# Altium PCB LPCB228R0.PcbDoc
Units mm, origin at the board's own origin, x right, y up, seen from the top; angles counter-clockwise.
Board outline 176 x 129 mm, 4 copper layers (Top Layer, MidLayer1, Mid-Layer 2, Bottom Layer); 69 components, 40 nets, 441 pads, 87 vias.
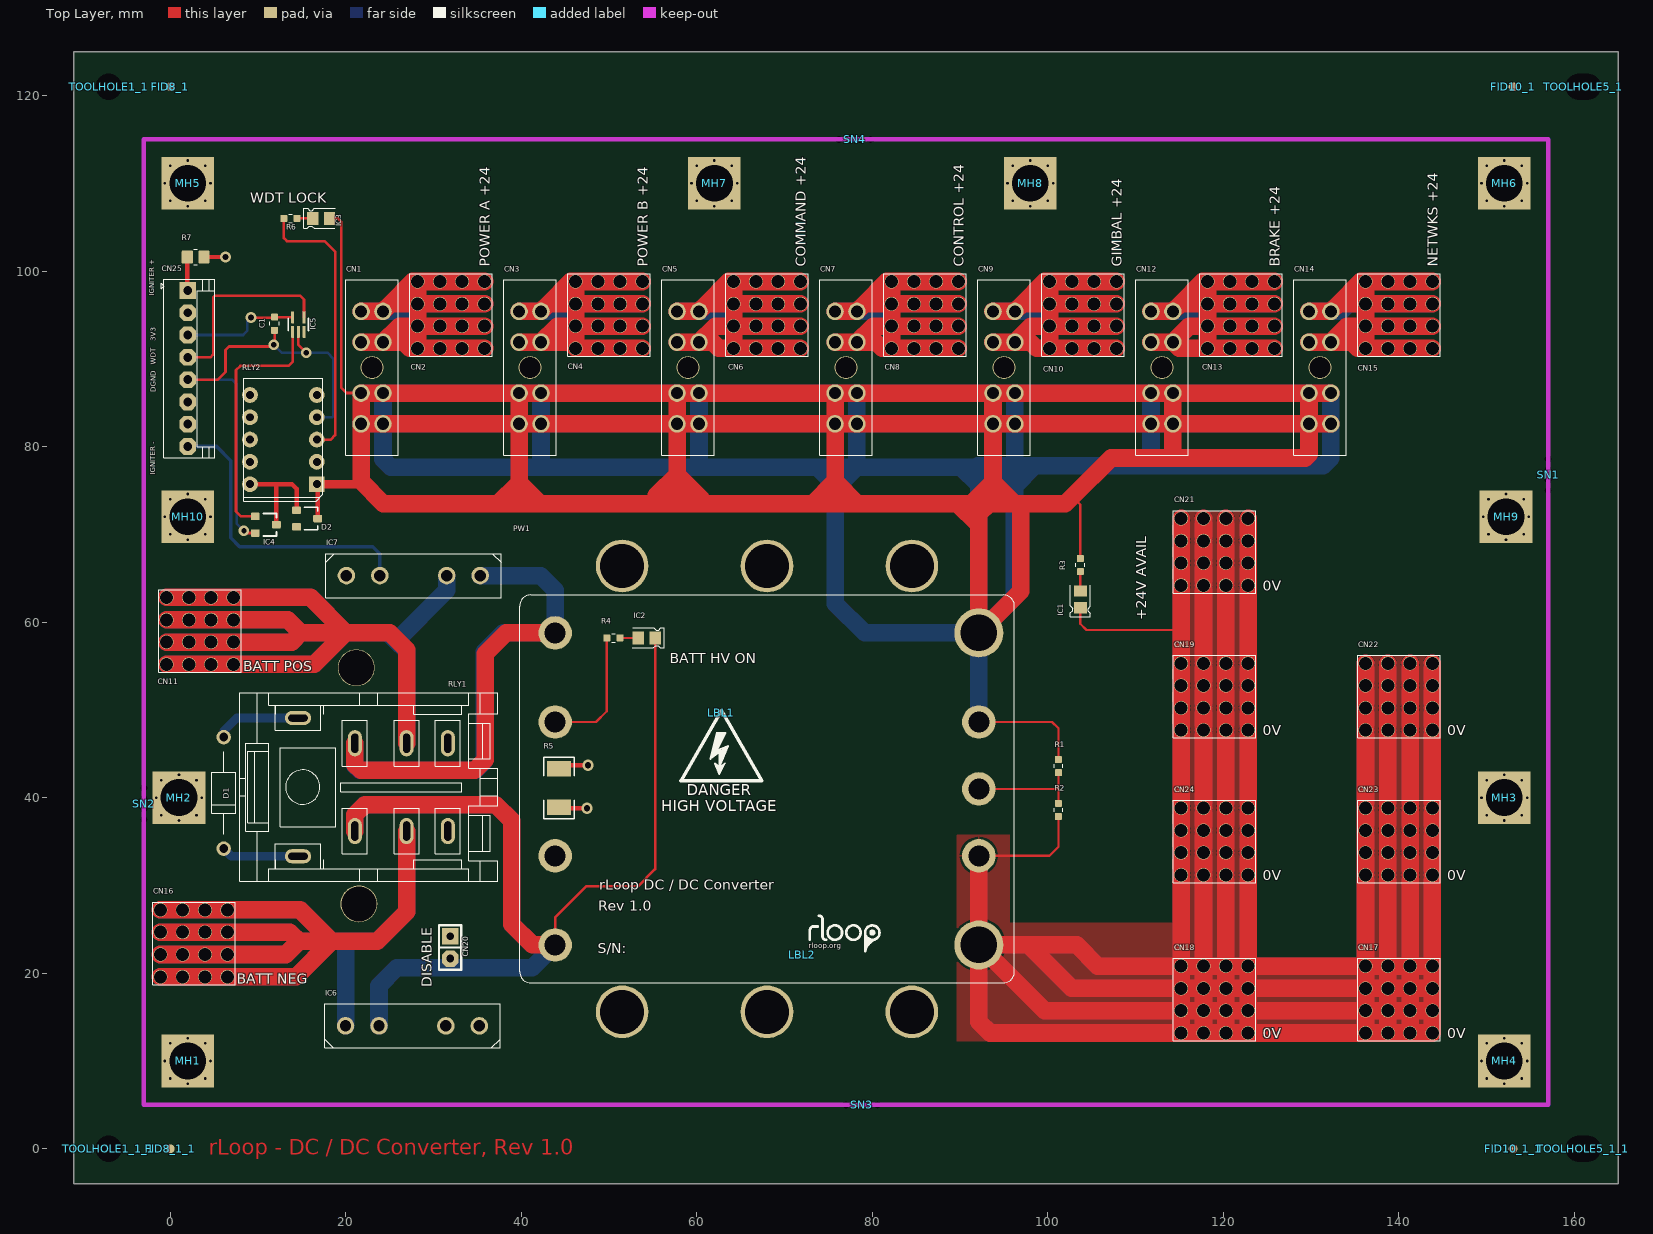
[diagram p0: Top Layer view]
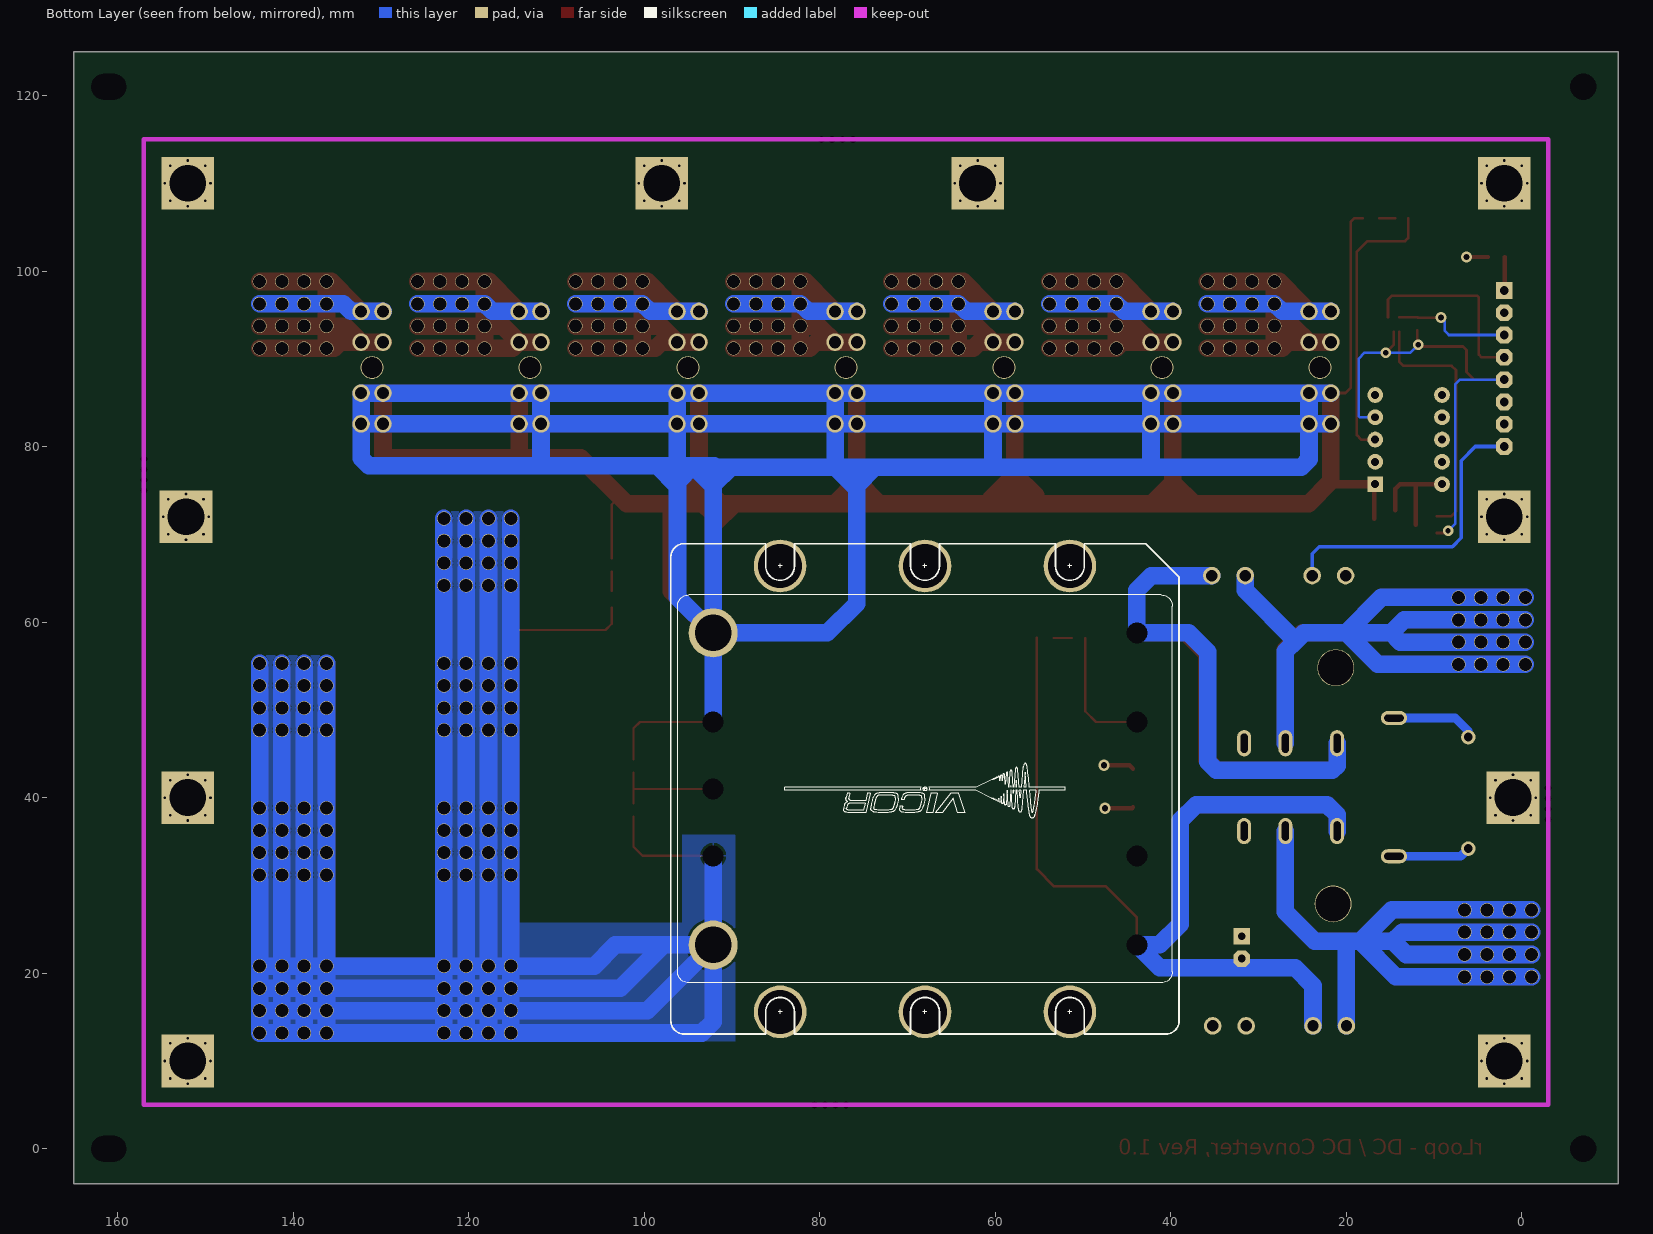
[diagram p1: Bottom Layer view, seen from below]
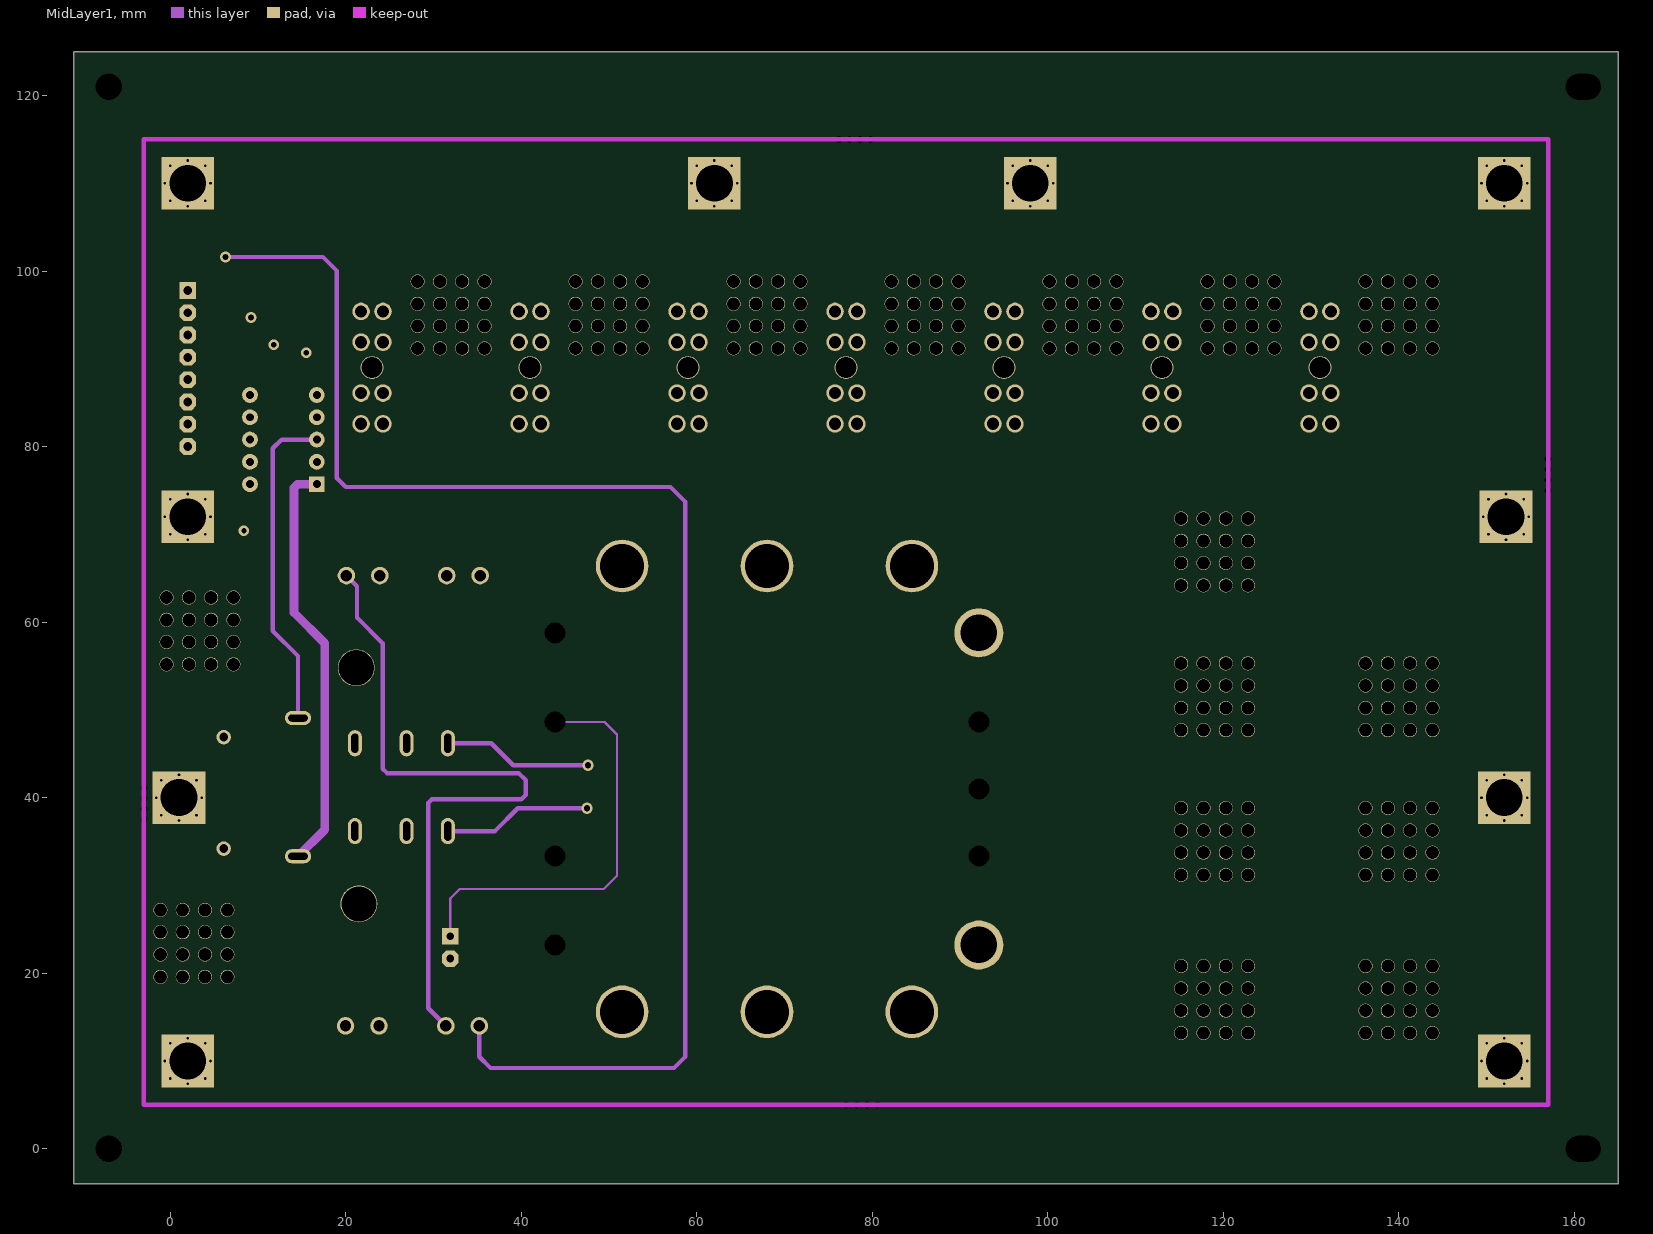
[diagram p2: MidLayer1]

## Layer stack, top to bottom
Top Layer: signal copper 0.0356
Dielectric: core 0.32, FR-4, Dk 4.8
MidLayer1: signal copper 0.0356
Dielectric: prepreg 0.32, FR-4, Dk 4.8
Mid-Layer 2: signal copper 0.0356
Dielectric: core 0.32, FR-4, Dk 4.8
Bottom Layer: signal copper 0.0356

## Board outline
-11,-4 -11,125 165,125 165,-4

## Design rules (kind name [scope] priority, off if disabled: settings)
Clearance [All] p1: gap=0.16
HoleSize [All] p1: absolutevalues=TRUE maxlimit=5 minlimit=0.025 maxpercent=80.000 minpercent=20.000
MinimumSolderMaskSliver [All] p1 off: minsoldermaskwidth=0.1
PlaneClearance [All] p1: clearance=0.6
PolygonConnect [IsVia] p1: connectstyle=Direct reliefconductorwidth=0.254 reliefentries=4 polygonreliefangle="90 Angle" airgapwidth=0.254
PolygonConnect PolygonConnect_1 [All] p2: connectstyle=Relief reliefconductorwidth=0.254 reliefentries=4 polygonreliefangle="90 Angle" airgapwidth=0.254
RoomDefinition "LPCB228 - POWERUP" [InComponentClass('LPCB228 - POWERUP')] p1: confinementstyle=ConfineIn formatcopy=TRUE lockcomponents=FALSE outline -59.611,-108.179 -8.811,-108.179 -8.811,-82.779 -59.611,-82.779
RoomDefinition "LPCB228 - TOP" [InComponentClass('LPCB228 - TOP')] p2: confinementstyle=ConfineIn formatcopy=TRUE lockcomponents=FALSE outline -59.611,-108.179 -8.811,-108.179 -8.811,-82.779 -59.611,-82.779
RoutingVias [All] p1: holewidth=0.6 width=1.2 viastyle="Through Hole" minholewidth=0.6 minwidth=1.2 maxholewidth=1 maxwidth=3
SilkToSilkClearance [All] p1 off: silktosilkclearance=0.254
SilkToSolderMaskClearance [IsPad] p1 off: minsilkscreentomaskgap=0.254 clearancetoexposedcopper=TRUE
SolderMaskExpansion [All] p1: expansion=0.102
Width [All] p1: maxlimit=2 minlimit=0.254 preferedwidth=0.254
23 further rules are at their usual default settings.

## Classes and differential pairs
component class "LPCB228 - POWERUP": C1 CN25 D1 D2 IC3 IC4 IC5 IC6 IC7 R5 R6 R7 RLY1 RLY2
component class "LPCB228 - TOP": CN1 CN2 CN3 CN4 CN5 CN6 CN7 CN8 CN9 CN10 CN11 CN12 CN13 CN14 CN15 CN16 CN17 CN18 CN19 CN20 CN21 CN22 CN23 CN24 IC1 IC2 LBL1 LBL2 MH1 MH2 MH3 MH4 MH5 MH6 MH7 MH8 MH9 MH10 PW1 R1 R2 R3 R4 SN1 SN2 SN3 SN4

## Components (designator, comment, footprint, x,y, rotation, side; value= is the part's Value field where it differs from the comment)
C1 "100n / 50V / 10% / SMD 0603" LFP011__CC1608-0603-IPC7351_B 11.9,94 r270 top
CN1 "SI-H-FKS 30" SI-H-FKS-30 23,89 r270 top
CN2 "7461383" 7461383 32,95 r0 top
CN3 "SI-H-FKS 30" SI-H-FKS-30 41,89 r270 top
CN4 "7461383" 7461383 50,95 r90 top
CN5 "SI-H-FKS 30" SI-H-FKS-30 59,89 r270 top
CN6 "7461383" 7461383 68,95 r0 top
CN7 "SI-H-FKS 30" SI-H-FKS-30 77,89 r270 top
CN8 "7461383" 7461383 86,95 r0 top
CN9 "SI-H-FKS 30" SI-H-FKS-30 95,89 r270 top
CN10 "7461383" 7461383 104,95 r0 top
CN11 "7461383" 7461383 3.4,59 r0 top locked
CN12 "SI-H-FKS 30" SI-H-FKS-30 113,89 r270 top
CN13 "7461383" 7461383 122,95 r0 top
CN14 "SI-H-FKS 30" SI-H-FKS-30 131,89 r270 top
CN15 "7461383" 7461383 140,95 r0 top
CN16 "7461383" 7461383 2.7,23.4 r0 top
CN17 "7461383" 7461383 140,17 r0 top
CN18 "7461383" 7461383 119,17 r0 top
CN19 "7461383" 7461383 119,51.5 r0 top
CN20 "HDR-2X1" HDR-2X1 31.9,24.2 r270 top
CN21 "7461383" 7461383 119,68 r0 top
CN22 "7461383" 7461383 140,51.5 r0 top
CN23 "7461383" 7461383 140,35 r0 top
CN24 "7461383" 7461383 119,35 r0 top
CN25 "640456-8" 640456-8 2,88.9 r270 top
D1 "1N4004" DO-41 6.1,46.9 r270 top
D2 "BAS16" LFP021__SOT23 15.6,71.8 r270 top
FID8_1 "FIDUCIAL" FIDTOP 0,121 r0 top
FID8_1_1 "FIDUCIAL" FIDTOP 0,0 r0 top
FID10_1 "FIDUCIAL" FIDTOP 153,121 r0 top
FID10_1_1 "FIDUCIAL" FIDTOP 153,0 r0 top
IC1 "EL-17-21VGC/TR8" CR2012-0805-LED 103.7,62.6 r90 top
IC2 "EL-17-21VGC/TR8" CR2012-0805-LED 54.3,58.2 r180 top
IC3 "EL-17-21VGC/TR8" CR2012-0805-LED 17.2,106 r0 top
IC4 "NUD3124LT1G" LFP021__SOT23 10.9,71.1 r270 top
IC5 "MAX6814XK+T" LFP047__SOT353 14.6,93.9 r0 top
IC6 "CPC1718J" ISOPLUS-264 27.6,14 r0 top
IC7 "CPC1718J" ISOPLUS-264 27.7,65.3 r180 top
LBL1 "MAINS POWER LABEL" "MAINS POWER LABEL" 62.8,49.7 r0 top
LBL2 "RLOOP_LOGO" RLOOP_LOGO 72,22.1 r0 top
MH1 "MOUNTING_HOLE_4MM" MOUNTING_HOLE_4MM 2,10 r0 top locked
MH2 "MOUNTING_HOLE_4MM" MOUNTING_HOLE_4MM 1,40 r0 top locked
MH3 "MOUNTING_HOLE_4MM" MOUNTING_HOLE_4MM 152,40 r0 top locked
MH4 "MOUNTING_HOLE_4MM" MOUNTING_HOLE_4MM 152,10 r0 top locked
MH5 "MOUNTING_HOLE_4MM" MOUNTING_HOLE_4MM 2,110 r0 top locked
MH6 "MOUNTING_HOLE_4MM" MOUNTING_HOLE_4MM 152,110 r0 top locked
MH7 "MOUNTING_HOLE_4MM" MOUNTING_HOLE_4MM 62,110 r0 top
MH8 "MOUNTING_HOLE_4MM" MOUNTING_HOLE_4MM 98,110 r0 top locked
MH9 "MOUNTING_HOLE_4MM" MOUNTING_HOLE_4MM 152.2,72 r0 top
MH10 "MOUNTING_HOLE_4MM" MOUNTING_HOLE_4MM 2,72 r0 top
PW1 "V72B24C250BL" FASTRAK_MINI_ONBOARD_MOUNT 68,41 r0 top locked
R1 "100K / 0.063W / 1% / SMD 0603" LFP020__CR1608-0603-IPC7351_B 101.2,43.6 r90 top
R2 "100K / 0.063W / 1% / SMD 0603" LFP020__CR1608-0603-IPC7351_B 101.2,38.6 r90 top
R3 "4.7K / 0.1W / 1% / SMD 0603" LFP020__CR1608-0603-IPC7351_B 103.7,66.5 r90 top
R4 "4.7K / 0.1W / 1% / SMD 0603" LFP020__CR1608-0603-IPC7351_B 50.5,58.2 r180 top
R5 "1K / 0.75W / 5% / 400V / SMD 2010" LFP060__CR5025-2010 44.3,41.1 r270 top
R6 "4.7K / 0.1W / 1% / SMD 0603" LFP020__CR1608-0603-IPC7351_B 13.7,106 r0 top
R7 "220R / 0.25W / 1% / SMD 0805" LFP029__CR2012-0805 2.9,101.6 r180 top
RLY1 "K10P-11D15-24" K10P-11D15-24 23.1,41.2 r270 top
RLY2 "TQ2-24" TQ2 12.9,80.8 r90 top
SN1 "PCB_SNAPOUT" SNAPOUT_NEW 157,75 r90 top
SN2 "PCB_SNAPOUT" SNAPOUT_NEW -3,37.5 r90 top
SN3 "PCB_SNAPOUT" SNAPOUT_NEW 80.6,5 r180 top
SN4 "PCB_SNAPOUT" SNAPOUT_NEW 79.8,115 r180 top
TOOLHOLE1_1 "Comment" TOOL-1#1 -7,121 r0 top
TOOLHOLE1_1_1 "Comment" TOOL-1#1 -7,0 r0 top
TOOLHOLE5_1 "Comment" TOOL-1#2 161,121 r0 top
TOOLHOLE5_1_1 "Comment" TOOL-1#2 161,0 r0 top

## Footprints (in the part's own frame and the unit in brackets; to place one, negate y for a bottom-side part, rotate by r counter-clockwise, add the part's x,y. Pads: shape width x height; smd on the part's side, far side on the other; paste and mask are expansions set on the pad)
640456-8 [mm] "Connector, Male Header, 8 Way"
  rect 1.905x1.905 hole 1.02: 1(-8.89,0)
  oct 1.905x1.905 hole 1.02: 2(-6.35,0) 3(-3.81,0) 4(-1.27,0) 5(1.27,0) 6(3.81,0) 7(6.35,0) 8(8.89,0)
  silkscreen extent -10.15,-3.04 10.17,3.1
7461383 [mm]
  round 1.6 hole 1.48: 1(-3.81,-3.81) 1(-3.81,-1.27) 1(-3.81,1.27) 1(-3.81,3.81) 1(-1.27,-3.81) 1(-1.27,-1.27) 1(-1.27,1.27) 1(-1.27,3.81) 1(1.27,-3.81) 1(1.27,-1.27) 1(1.27,1.27) 1(1.27,3.81) 1(3.81,-3.81) 1(3.81,-1.27) 1(3.81,1.27) 1(3.81,3.81)
  silkscreen extent -4.7,-4.7 4.7,4.7
CR2012-0805-LED [mm]
  rect 1.3x1.5 smd: A(0.95,0) K(-0.95,0)
  silkscreen extent -2.01,-1.14 1.63,1.14
DO-41 [mil]
  round 65 hole 40: A(0,0) K(500,0)
  silkscreen extent 65,-53 435,53
FASTRAK_MINI_ONBOARD_MOUNT [mm]
  round 3.81 / inner round 1.524 / far side round 1.524 hole 2.388: 1(-24.13,17.78) 2(-24.13,7.62) 3(-24.13,-7.62) 4(-24.13,-17.78) 6(24.13,-7.62) 7(24.13,0) 8(24.13,7.62)
  round 5.588 hole 4.166: 5(24.13,-17.78) 9(24.13,17.78)
  round 6 hole 5: B(-16.51,-25.4) B(-16.51,25.4) B(0,-25.4) B(0,25.4) B(16.5,-25.4) B(16.51,25.4)
  silkscreen extent -28.19,-22.1 28.19,22.1
FIDTOP [mil]
  round 40 smd mask+39.37: 1(0,0)
HDR-2X1 [mil] "2-Pin connector"
  rect 75x75 hole 35: 1(0,0)
  oct 75x75 hole 35: 2(100,0)
  silkscreen extent -50,-50 150,50
ISOPLUS-264 [mm]
  round 2 hole 1.3: 1(-7.62,0) 2(-3.81,0) 3(3.81,0) 4(7.62,0)
  silkscreen extent -10,-2.5 10,2.5
K10P-11D15-24 [mm]
  oval 3x1.6 hole 0.8 slot 2.2 at 0 deg: 1(5.005,8.535) 2(-5.005,8.535) 3(5.005,3.835) 4(-5.005,3.835) 5(5.005,-2.055) 6(-5.005,-2.055)
  oval 1.6x3 hole 0.8 slot 2.2 at 90 deg: A(7.875,-8.535) B(-7.875,-8.535)
  silkscreen extent -10.73,-15.17 10.71,14.24
LFP011__CC1608-0603-IPC7351_B [mm]
  rrect25% 0.8x0.8 smd: 1(-0.75,0) 2(0.75,0)
  silkscreen extent -0.2,-0.55 0.2,0.55
LFP020__CR1608-0603-IPC7351_B [mm]
  rrect25% 0.8x0.8 smd: 1(-0.75,0) 2(0.75,0)
  silkscreen extent -0.2,-0.5 0.2,0.5
LFP021__SOT23 [mm] "SOT-23; 3 Leads; Body 3.0 x 2.5 mm, inc. leads (LxW max)"
  rrect25% 0.85x1 smd paste-0.05: 1(-0.95,-1.2) 2(0.95,-1.2) 3(0,1.2)
  silkscreen extent -1.27,-0.3 1.28,1.2
LFP029__CR2012-0805 [mm]
  rrect25% 1.3x1.5 smd paste-0.01: 1(-0.95,0) 2(0.95,0)
  silkscreen extent -0.2,-0.9 0.2,0.9
LFP047__SOT353 [mm] "SOT-353/SC-88A; 5 Leads; Body 2.2 x 2.2 mm, inc. leads (LxW max)"
  rrect25% 0.35x1.35 smd paste-0.03: 1(-0.65,-0.825) 2(0,-0.825) 3(0.65,-0.825) 4(0.65,0.825) 5(-0.65,0.825)
  silkscreen extent -1.15,-0.7 1.15,0.7
LFP060__CR5025-2010 [mm]
  rect 1.8x2.7 smd: 1(-2.2,0) 2(2.2,0)
  silkscreen extent -3.5,-1.75 3.5,1.75
"MAINS POWER LABEL" [mm]
  silkscreen extent -4.62,-7.79 4.62,0.21
MOUNTING_HOLE_4MM [mm] "Non-plated mounting hole for 4mm screw"
  rect 6x6 hole 4.2 mask+0.2: MOUNT(0,0)
RLOOP_LOGO [mm]
  silkscreen extent 0.89,0.39 8.82,4.45
SI-H-FKS-30 [mm] "Connector, Blade Fuse Holder, 5mm Terminals, 30A Max, PTH"
  round 2 hole 1.4: 1(2.9,1.25) 1(2.9,-1.25) 1(6.4,-1.25) 1(6.4,1.25) 2(-6.4,-1.25) 2(-6.4,1.25) 2(-2.9,1.25) 2(-2.9,-1.25)
  round 2.6 hole 2.4: B(0,0)
  silkscreen extent -10,-3 10,3
SNAPOUT_NEW [mm]
  round 0.4 hole 0.8 unplated: 0(0,0) 0(1.2,0) 0(2.4,0) 0(3.6,0)
TOOL-1#1 [mm]
  round 2.54 hole 3 unplated: TOOL(0,0)
TOOL-1#2 [mm]
  round 0.076 hole 3 slot 4 at 0 deg unplated: TOOL1(0,0)
TQ2 [mm]
  rect 1.8x1.8 hole 0.9: 1(-5.08,-3.81)
  round 1.8 hole 0.9: 2(-2.54,-3.81) 3(0,-3.81) 4(2.54,-3.81) 5(5.08,-3.81) 6(5.08,3.81) 7(2.54,3.81) 8(0,3.81) 9(-2.54,3.81) 10(-5.08,3.81)
  silkscreen extent -7,-4.5 7,4.5

## Part data
C1: "Capacitor, Ceramic Chip, 100nF (0.1uF), 50V, 5%, SMD 0603 [LCA016]"
CN1 CN3 CN5 CN7 CN9 CN12 CN14: "Connector, Blade Fuse Holder, 5mm Terminals, 30A Max, PTH"
CN2 CN4 CN6 CN8 CN10 CN11 CN13 CN15 CN16 CN17 CN18 CN19 CN21 CN22 CN23 CN24: "Terminal, Bush with M5 Shank"
CN20: "Header, 2.54mm (0.1in), 2 Pins x 1 Row (40 Per Row In Strip)"
CN25: "Connector, Male Header, 8 Way"
D1: "Diode, General Purpose Rectifier, 1A, PTH [LIC010]"
D2: "Diode, Small Signal, 0.2A, 85V, SMD SOT-23 [LIC006]"
IC1 IC2 IC3: "LED, SMD, 0805 Green [LIC016]"
IC4: "IC, Relay Driver, 28V Industrial, SMD SOT23 [LIC292]"
IC5: "IC, Watchdog, SMD [LIC580]"
IC6 IC7: "IC, Solid State Relay, PTH [LIC579]"
MH1 MH2 MH3 MH4 MH5 MH6 MH7 MH8 MH9 MH10: "4MM Mouting Hole"
PW1: "DC-DC Converter, 43-110VIN, 24V, 10A"
R1 R2: "Resistor, Ceramic Chip, 100K0, 0.063W, 1%, SMD 0603 [LRE107]"
R3 R4 R6: "Resistor, Ceramic Chip, 4K7, 0.1W, 1%, SMD 0603 [LRE058]"
R5: "Resistor, Thick Film, 1K, 0.75W, 5%, 400V, SMD 2010 [LRE133]"
R7: "Resistor, Ceramic Chip, 220R, 0.25W, 1%, SMD 0805 [LRE013]"
RLY1: "Relay, DPDT, 24V, Socket Mount"
RLY2: "Relay, DPDT, Non Latching, 24VDC Coil, 1A Rating, PTH"

## Free pads (board coordinates)
  round 4.2 hole 4: TIE(21.2,54.8) TIE(21.5,27.9)

## Via types
v1: diameter 0.6, hole 0.3, Top Layer to Bottom Layer, 80 vias
v2: diameter 1.27, hole 0.711, Top Layer to Bottom Layer, 4 vias
v3: diameter 1.2, hole 0.6, Top Layer to Bottom Layer, 3 vias

## Nets (pads, with @x,y where several pads share a name; then routed paths per layer and width w, separated by ;. In a path a pad name is that pad's centre, name@x,y a point inside that pad or via, vN(x,y) a via of type N, cw(c..) or ccw(c..) an arc to the next point about the centre after c; other vN are vias at no path point)
BATT_N_HOT: CN16.1 IC6.1 RLY1.3 | length 205.4
  Top Layer w0.254: 14.5,27.5 14.79,27.21
  Top Layer w2: CN16.1@-1.11,19.59 1.43,19.59 3.97,19.59 6.51,19.59 14.35,19.59 18.38,23.62 ; CN16.1@-1.11,22.13 1.43,22.13 3.97,22.13 6.51,22.13 13.19,22.13 14.68,23.62 ; CN16.1@-1.11,24.67 1.43,24.67 3.97,24.67 6.51,24.67 13.63,24.67 14.68,23.62 ; CN16.1@-1.11,27.21 1.43,27.21 3.97,27.21 6.51,27.21 9.6,27.21 14.79,27.21 18.38,23.62 ; RLY1.3 26.935,26.985 23.57,23.62 18.38,23.62 ; 14.68,23.62 18.38,23.62
  Bottom Layer w2: CN16.1@-1.11,19.59 1.43,19.59 3.97,19.59 6.51,19.59 14.35,19.59 18.38,23.62 ; CN16.1@-1.11,22.13 1.43,22.13 3.97,22.13 6.51,22.13 13.19,22.13 14.68,23.62 ; CN16.1@-1.11,24.67 1.43,24.67 3.97,24.67 6.51,24.67 13.63,24.67 14.68,23.62 ; CN16.1@-1.11,27.21 1.43,27.21 3.97,27.21 6.51,27.21 14.79,27.21 18.38,23.62 ; IC6.1 19.98,23.44 19.8,23.62 ; RLY1.3 26.935,26.985 23.57,23.62 19.8,23.62 ; 14.68,23.62 18.38,23.62 ; 18.38,23.62 19.8,23.62
BATT_N_SW: CN20.2 IC2.K IC6.2 PW1.4 RLY1.5 | length 147.1
  Top Layer w0.3: PW1.4 43.87,26.37 47.4,29.9 53.3,29.9 55.25,31.85 IC2.K
  Top Layer w2: RLY1.5 21.045,38.045 22.2,39.2 37.1,39.2 38.9,37.4 38.9,25.6 41.28,23.22 PW1.4
  Bottom Layer w2: RLY1.5 21.045,38.045 22.2,39.2 37.1,39.2 38.9,37.4 38.9,25.6 41.28,23.22 PW1.4 41.25,20.6 25.8,20.6 23.79,18.59 IC6.2
BATT_P_HOT: CN11.1 IC7.2 RLY1.4 | length 208
  Top Layer w2: CN11.1@-0.41,55.19 2.13,55.19 4.67,55.19 7.21,55.19 16.43,55.19 20.02,58.78 ; CN11.1@-0.41,57.73 2.13,57.73 4.67,57.73 7.21,57.73 13.83,57.73 14.88,58.78 ; CN11.1@-0.41,60.27 2.13,60.27 4.67,60.27 7.21,60.27 13.39,60.27 14.88,58.78 ; CN11.1@-0.41,62.81 2.13,62.81 4.67,62.81 7.21,62.81 15.99,62.81 20.02,58.78 ; RLY1.4 26.935,56.865 25.02,58.78 20.02,58.78 ; 14.88,58.78 20.02,58.78
  Bottom Layer w2: CN11.1@-0.41,55.19 2.13,55.19 4.67,55.19 7.21,55.19 16.43,55.19 20.02,58.78 ; CN11.1@-0.41,57.73 2.13,57.73 4.67,57.73 7.21,57.73 13.83,57.73 14.88,58.78 ; CN11.1@-0.41,60.27 2.13,60.27 4.67,60.27 7.21,60.27 13.39,60.27 14.88,58.78 ; CN11.1@-0.41,62.81 2.13,62.81 4.67,62.81 7.21,62.81 15.99,62.81 20.02,58.78 ; RLY1.4 26.935,56.665 25.75,57.85 ; IC7.2 31.51,63.61 25.75,57.85 ; 14.88,58.78 20.02,58.78 ; 20.02,58.78 24.82,58.78 25.75,57.85
BATT_P_SW: IC7.1 PW1.1 RLY1.6 | length 92.6
  Top Layer w2: RLY1.6 21.045,43.755 21.7,43.1 34.7,43.1 35.9,44.3 35.9,56.4 38.28,58.78 PW1.1
  Bottom Layer w2: RLY1.6 21.045,43.655 21.6,43.1 34.8,43.1 35.8,44.1 35.8,56.6 37.98,58.78 PW1.1 43.87,63.63 42.2,65.3 IC7.1
D3V3: C1.1 CN25.3 IC5.5 | length 13.4
  Top Layer w0.3: v2(9.2,94.7) 11.85,94.7 C1.1 13.925,94.75 IC5.5
  Bottom Layer w0.3: CN25.3 8.31,92.71 8.8,93.2 8.8,94.3 v2(9.2,94.7)
DGND: C1.2 CN25.5 IC4.2 IC5.2 RLY2.4 | length 57.7
  Top Layer w0.3: CN25.5 5.43,87.63 6.3,88.5 6.3,91 6.7,91.4 11.9,91.4 C1.2 ; v3(8.4,70.4) 8.65,70.15 IC4.2 ; IC5.2 14.6,91.6 v3(15.5,90.7)
  Bottom Layer w0.3: CN25.5 7.07,87.63 7.6,87.1 7.6,71.2 v3(8.4,70.4) ; v3(11.8,91.6) 12.7,90.7 v3(15.5,90.7) 17.9,90.7 18.6,90 18.6,83.5 18.44,83.34 RLY2.4
ISO1: MH9.MOUNT
  other v1: 152.2,69.4 150.2,70 154.2,70 149.6,72 154.8,72 150.2,74 154.2,74 152.2,74.6
ISO2: MH7.MOUNT
  other v1: 62,107.4 60,108 64,108 59.4,110 64.6,110 60,112 64,112 62,112.6
ISO3: MH1.MOUNT
  other v1: 2,7.4 0,8 4,8 -0.6,10 4.6,10 0,12 4,12 2,12.6
ISO4: MH3.MOUNT
  other v1: 152,37.4 150,38 154,38 149.4,40 154.6,40 150,42 154,42 152,42.6
ISO5: MH5.MOUNT
  other v1: 2,107.4 0,108 4,108 -0.6,110 4.6,110 0,112 4,112 2,112.6
ISO6: MH6.MOUNT
  other v1: 152,107.4 150,108 154,108 149.4,110 154.6,110 150,112 154,112 152,112.6
ISO7: MH4.MOUNT
  other v1: 152,7.4 150,8 154,8 149.4,10 154.6,10 150,12 154,12 152,12.6
ISO8: MH2.MOUNT
  other v1: 1,37.4 -1,38 3,38 -1.6,40 3.6,40 -1,42 3,42 1,42.6
ISO9: MH8.MOUNT
  other v1: 98,107.4 96,108 100,108 95.4,110 100.6,110 96,112 100,112 98,112.6
ISO10: MH10.MOUNT
  other v1: 2,69.4 0,70 4,70 -0.6,72 4.6,72 0,74 4,74 2,74.6
NetCN1_2: CN1.2 CN2.1 | length 74.9
  Top Layer w2: CN1.2@21.75,91.9 CN1.2@24.25,91.9 ; CN1.2@21.75,95.4 24.25,95.4 25.12,96.27 ; CN2.1@35.81,91.19 33.27,91.19 30.73,91.19 CN2.1@28.19,91.19 ; CN2.1@35.81,93.73 33.27,93.73 30.73,93.73 CN2.1@28.19,93.73 ; CN2.1@35.81,96.27 33.27,96.27 30.73,96.27 CN2.1@28.19,96.27 ; CN2.1@35.81,98.81 33.27,98.81 30.73,98.81 CN2.1@28.19,98.81 ; CN1.2@24.25,91.9 26.6,91.9 27.31,91.19 CN2.1@28.19,91.19 ; CN1.2@24.25,91.9 26.08,93.73 CN2.1@28.19,93.73 ; 25.12,96.27 CN2.1@28.19,96.27 ; 25.12,96.27 27.66,98.81 CN2.1@28.19,98.81 ; CN2.1@28.19,91.19 CN2.1@28.19,93.73 ; CN2.1@28.19,93.73 CN2.1@28.19,96.27 ; CN2.1@28.19,96.27 CN2.1@28.19,98.81
  Bottom Layer w2: CN1.2@21.75,95.4 24.25,95.4 27.32,95.4 28.19,96.27 30.73,96.27 33.27,96.27 CN2.1@35.81,96.27
NetCN3_2: CN3.2 CN4.1 | length 74.9
  Top Layer w2: CN3.2@39.75,91.9 CN3.2@42.25,91.9 ; CN3.2@39.75,95.4 42.25,95.4 43.12,96.27 ; CN4.1@53.81,91.19 51.27,91.19 48.73,91.19 CN4.1@46.19,91.19 ; CN4.1@53.81,93.73 51.27,93.73 48.73,93.73 CN4.1@46.19,93.73 ; CN4.1@53.81,96.27 51.27,96.27 48.73,96.27 CN4.1@46.19,96.27 ; CN4.1@53.81,98.81 51.27,98.81 48.73,98.81 CN4.1@46.19,98.81 ; CN3.2@42.25,91.9 45.48,91.9 CN4.1@46.19,91.19 ; CN3.2@42.25,91.9 44.08,93.73 CN4.1@46.19,93.73 ; 43.12,96.27 CN4.1@46.19,96.27 ; 43.12,96.27 45.66,98.81 CN4.1@46.19,98.81 ; CN4.1@46.19,91.19 CN4.1@46.19,93.73 ; CN4.1@46.19,93.73 CN4.1@46.19,96.27 ; CN4.1@46.19,96.27 CN4.1@46.19,98.81
  Bottom Layer w2: CN3.2@39.75,95.4 42.25,95.4 45.32,95.4 46.19,96.27 48.73,96.27 51.27,96.27 CN4.1@53.81,96.27
NetCN5_2: CN5.2 CN6.1 | length 74.9
  Top Layer w2: CN5.2@57.75,91.9 CN5.2@60.25,91.9 ; CN5.2@57.75,95.4 60.25,95.4 61.12,96.27 ; CN6.1@71.81,91.19 69.27,91.19 66.73,91.19 CN6.1@64.19,91.19 ; CN6.1@71.81,93.73 69.27,93.73 66.73,93.73 CN6.1@64.19,93.73 ; CN6.1@71.81,96.27 69.27,96.27 66.73,96.27 CN6.1@64.19,96.27 ; CN6.1@71.81,98.81 69.27,98.81 66.73,98.81 CN6.1@64.19,98.81 ; CN5.2@60.25,91.9 61.8,91.9 62.51,91.19 CN6.1@64.19,91.19 ; CN5.2@60.25,91.9 62.08,93.73 CN6.1@64.19,93.73 ; 61.12,96.27 CN6.1@64.19,96.27 ; 61.12,96.27 63.66,98.81 CN6.1@64.19,98.81 ; CN6.1@64.19,91.19 CN6.1@64.19,93.73 ; CN6.1@64.19,93.73 CN6.1@64.19,96.27 ; CN6.1@64.19,96.27 CN6.1@64.19,98.81
  Bottom Layer w2: CN5.2@57.75,95.4 60.25,95.4 63.32,95.4 64.19,96.27 66.73,96.27 69.27,96.27 CN6.1@71.81,96.27
NetCN7_2: CN7.2 CN8.1 | length 74.9
  Top Layer w2: CN7.2@75.75,91.9 CN7.2@78.25,91.9 ; CN7.2@75.75,95.4 78.25,95.4 79.12,96.27 ; CN8.1@89.81,91.19 87.27,91.19 84.73,91.19 CN8.1@82.19,91.19 ; CN8.1@89.81,93.73 87.27,93.73 84.73,93.73 CN8.1@82.19,93.73 ; CN8.1@89.81,96.27 87.27,96.27 84.73,96.27 CN8.1@82.19,96.27 ; CN8.1@89.81,98.81 87.27,98.81 84.73,98.81 CN8.1@82.19,98.81 ; CN7.2@78.25,91.9 80.4,91.9 81.11,91.19 CN8.1@82.19,91.19 ; CN7.2@78.25,91.9 80.08,93.73 CN8.1@82.19,93.73 ; 79.12,96.27 CN8.1@82.19,96.27 ; 79.12,96.27 81.66,98.81 CN8.1@82.19,98.81 ; CN8.1@82.19,91.19 CN8.1@82.19,93.73 ; CN8.1@82.19,93.73 CN8.1@82.19,96.27 ; CN8.1@82.19,96.27 CN8.1@82.19,98.81
  Bottom Layer w2: CN7.2@75.75,95.4 78.25,95.4 81.32,95.4 82.19,96.27 84.73,96.27 87.27,96.27 CN8.1@89.81,96.27
NetCN9_2: CN9.2 CN10.1 | length 74.9
  Top Layer w2: CN9.2@93.75,91.9 CN9.2@96.25,91.9 ; CN9.2@93.75,95.4 96.25,95.4 97.12,96.27 ; CN10.1@107.81,91.19 105.27,91.19 102.73,91.19 CN10.1@100.19,91.19 ; CN10.1@107.81,93.73 105.27,93.73 102.73,93.73 CN10.1@100.19,93.73 ; CN10.1@107.81,96.27 105.27,96.27 102.73,96.27 CN10.1@100.19,96.27 ; CN10.1@107.81,98.81 105.27,98.81 102.73,98.81 CN10.1@100.19,98.81 ; CN9.2@96.25,91.9 98,91.9 98.71,91.19 CN10.1@100.19,91.19 ; CN9.2@96.25,91.9 98.08,93.73 CN10.1@100.19,93.73 ; 97.12,96.27 CN10.1@100.19,96.27 ; 97.12,96.27 99.66,98.81 CN10.1@100.19,98.81 ; CN10.1@100.19,91.19 CN10.1@100.19,93.73 ; CN10.1@100.19,93.73 CN10.1@100.19,96.27 ; CN10.1@100.19,96.27 CN10.1@100.19,98.81
  Bottom Layer w2: CN9.2@93.75,95.4 96.25,95.4 99.32,95.4 100.19,96.27 102.73,96.27 105.27,96.27 CN10.1@107.81,96.27
NetCN12_2: CN12.2 CN13.1 | length 74.9
  Top Layer w2: CN12.2@111.75,91.9 CN12.2@114.25,91.9 ; CN12.2@111.75,95.4 114.25,95.4 115.12,96.27 ; CN13.1@125.81,91.19 123.27,91.19 120.73,91.19 CN13.1@118.19,91.19 ; CN13.1@125.81,93.73 123.27,93.73 120.73,93.73 CN13.1@118.19,93.73 ; CN13.1@125.81,96.27 123.27,96.27 120.73,96.27 CN13.1@118.19,96.27 ; CN13.1@125.81,98.81 123.27,98.81 120.73,98.81 CN13.1@118.19,98.81 ; CN12.2@114.25,91.9 116.08,93.73 CN13.1@118.19,93.73 ; CN12.2@114.25,91.9 114.96,91.19 CN13.1@118.19,91.19 ; 115.12,96.27 CN13.1@118.19,96.27 ; 115.12,96.27 117.66,98.81 CN13.1@118.19,98.81 ; CN13.1@118.19,91.19 CN13.1@118.19,93.73 ; CN13.1@118.19,93.73 CN13.1@118.19,96.27 ; CN13.1@118.19,96.27 CN13.1@118.19,98.81
  Bottom Layer w2: CN12.2@111.75,95.4 114.25,95.4 117.32,95.4 118.19,96.27 120.73,96.27 123.27,96.27 CN13.1@125.81,96.27
NetCN14_2: CN14.2 CN15.1 | length 74.9
  Top Layer w2: CN14.2@129.75,91.9 CN14.2@132.25,91.9 ; CN14.2@129.75,95.4 132.25,95.4 133.12,96.27 ; CN15.1@143.81,91.19 141.27,91.19 138.73,91.19 CN15.1@136.19,91.19 ; CN15.1@143.81,93.73 141.27,93.73 138.73,93.73 CN15.1@136.19,93.73 ; CN15.1@143.81,96.27 141.27,96.27 138.73,96.27 CN15.1@136.19,96.27 ; CN15.1@143.81,98.81 141.27,98.81 138.73,98.81 CN15.1@136.19,98.81 ; CN14.2@132.25,91.9 134.6,91.9 135.31,91.19 CN15.1@136.19,91.19 ; CN14.2@132.25,91.9 134.08,93.73 CN15.1@136.19,93.73 ; 133.12,96.27 CN15.1@136.19,96.27 ; 133.12,96.27 135.66,98.81 CN15.1@136.19,98.81 ; CN15.1@136.19,91.19 CN15.1@136.19,93.73 ; CN15.1@136.19,93.73 CN15.1@136.19,96.27 ; CN15.1@136.19,96.27 CN15.1@136.19,98.81
  Bottom Layer w2: CN14.2@129.75,95.4 132.25,95.4 133.4,95.4 134.27,96.27 136.19,96.27 138.73,96.27 141.27,96.27 CN15.1@143.81,96.27
NetCN20_1: CN20.1 PW1.2 R4.2 | length 62.8
  Top Layer w0.254: PW1.2 48.52,48.62 49.75,49.85 R4.2
  MidLayer1 w0.254: CN20.1 31.9,28.5 33,29.6 49.4,29.6 50.9,31.1 50.9,47.2 49.48,48.62 PW1.2
NetCN25_1: CN25.1 R7.2 | length 3.8
  Top Layer w0.5: R7.2 1.95,97.84 CN25.1
NetCN25_4: CN25.4 IC5.4 | length 22.2
  Top Layer w0.3: CN25.4 4.57,90.17 4.9,90.5 4.9,97 5.1,97.2 14.8,97.2 15.25,96.75 IC5.4
NetCN25_8: CN25.8 IC7.3 | length 34.6
  Bottom Layer w0.4: CN25.8 5.29,80.01 6.9,78.4 6.9,69.6 7.9,68.6 23.1,68.6 23.89,67.81 IC7.3
NetD1_A: D1.A R6.1 RLY1.B RLY2.3 | length 79.1
  Top Layer w0.3: R6.1 12.95,103.75 13.3,103.4 17.6,103.4 18.8,102.2 18.8,81.3 18.3,80.8 RLY2.3
  MidLayer1 w0.5: RLY1.B 14.565,56.135 11.7,59 11.7,79.8 12.7,80.8 RLY2.3
  Bottom Layer w1: D1.A 6.1,47.6 7.575,49.075 RLY1.B
NetD2_1: D2.1 IC4.3 RLY2.10 | length 12.6
  Top Layer w0.5: RLY2.10 12.1,75.72 ; IC4.3 12.1,75.72 ; D2.1 14.4,75.2 13.88,75.72 12.1,75.72
NetIC1_A: IC1.A R3.1 | length 2.2
  Top Layer w0.254: IC1.A R3.1
NetIC2_A: IC2.A R4.1 | length 2.1
  Top Layer w0.254: R4.1 IC2.A
NetIC3_K: IC3.K R6.2 | length 1.8
  Top Layer w0.3: R6.2 IC3.K
NetIC4_1: IC4.1 IC5.1 | length 28.8
  Top Layer w0.3: IC4.1 8.05,72.05 7.5,72.6 7.5,88.7 8,89.2 13.5,89.2 13.95,89.65 IC5.1
NetIC6_3: IC6.3 IC7.4 | length 80
  MidLayer1 w0.5: IC7.4 21.28,64.1 21.28,60.52 24.2,57.6 24.2,43.3 24.7,42.8 39.7,42.8 40.5,42 40.5,40.3 40,39.8 29.8,39.8 29.4,39.4 29.4,16.01 IC6.3
NetIC6_4: IC6.4 R7.1 | length 171.5
  Top Layer w0.5: R7.1 v2(6.3,101.6)
  MidLayer1 w0.5: v2(6.3,101.6) 17.4,101.6 19,100 19,76.4 20,75.4 57,75.4 58.7,73.7 58.7,10.5 57.4,9.2 36.5,9.2 35.22,10.48 IC6.4
NetPW1_7: PW1.7 R1.1 R2.2 | length 12.6
  Top Layer w0.254: PW1.7 101.2,41 ; R2.2 101.2,41 ; R1.1 101.2,41
NetR5_1: R5.1 RLY1.2 | length 20.5
  Top Layer w0.5: R5.1 44.7,43.7 v2(47.6,43.7)
  MidLayer1 w0.5: RLY1.2 36.595,46.205 39.1,43.7 v2(47.6,43.7)
NetR5_2: R5.2 RLY1.1 | length 20.2
  Top Layer w0.5: R5.2 44.4,38.8 v2(47.5,38.8)
  MidLayer1 w0.5: RLY1.1 36.995,36.195 39.6,38.8 v2(47.5,38.8)
P24V: CN1.1 CN3.1 CN5.1 CN7.1 CN9.1 CN12.1 CN14.1 D1.K D2.3 IC3.A PW1.8 PW1.9 R1.2 R3.2 RLY1.A RLY2.1 | length 1069.5
  Top Layer w0.254: PW1.8 100.48,48.62 101.2,47.9 R1.2 ; 102.8,74.3 103.7,73.4 R3.2
  Top Layer w0.3: IC3.A 19.1,106 19.5,105.6 19.5,86.7 20.1,86.1 CN1.1@21.75,86.1
  Top Layer w0.5: RLY2.1 16.8,75.63 D2.3
  Top Layer w1: RLY2.1 21.42,75.72 21.75,76.05
  Top Layer w2: CN14.1@132.25,82.6 CN14.1@129.75,82.6 ; CN14.1@132.25,86.1 CN14.1@129.75,86.1 ; CN1.1@21.75,82.6 21.75,76.05 24.3,73.5 37.35,73.5 ; CN1.1@21.75,82.6 21.75,86.1 24.25,86.1 CN3.1@39.75,86.1 ; CN1.1@21.75,82.6 24.25,82.6 CN3.1@39.75,82.6 ; 37.35,73.5 39.75,75.9 ; 37.35,73.5 39.5,73.5 ; 39.5,73.5 39.75,73.75 39.75,75.9 ; 39.5,73.5 42.15,73.5 ; 39.75,75.9 CN3.1@39.75,82.6 ; 39.75,75.9 42.15,73.5 ; CN3.1@39.75,82.6 CN3.1@39.75,86.1 ; CN3.1@39.75,82.6 42.25,82.6 CN5.1@57.75,82.6 ; CN3.1@39.75,86.1 42.25,86.1 CN5.1@57.75,86.1 ; 42.15,73.5 55.4,73.5 ; 55.4,73.5 55.4,74.45 57.75,76.8 ; 55.4,73.5 57.8,73.5 ; 57.75,76.8 57.75,73.55 57.8,73.5 ; 57.75,76.8 CN5.1@57.75,82.6 ; 57.75,76.8 60.5,74.05 60.5,73.5 ; CN5.1@57.75,82.6 CN5.1@57.75,86.1 ; CN5.1@57.75,82.6 60.25,82.6 CN7.1@75.75,82.6 ; CN5.1@57.75,86.1 60.25,86.1 CN7.1@75.75,86.1 ; 57.8,73.5 60.5,73.5 ; 60.5,73.5 73.2,73.5 ; 73.2,73.5 75.75,76.05 ; 73.2,73.5 75.9,73.5 ; 75.75,76.05 75.75,73.65 75.9,73.5 ; 75.75,76.05 78.3,73.5 ; 75.75,76.05 CN7.1@75.75,82.6 ; CN7.1@75.75,82.6 CN7.1@75.75,86.1 ; CN7.1@75.75,82.6 78.25,82.6 CN9.1@93.75,82.6 ; CN7.1@75.75,86.1 78.25,86.1 CN9.1@93.75,86.1 ; 75.9,73.5 78.3,73.5 ; 78.3,73.5 89.7,73.5 ; 89.7,73.5 92.13,71.07 ; 89.7,73.5 91.3,73.5 ; 91.3,73.5 93.75,75.95 ; 91.3,73.5 93.3,73.5 ; 92.13,71.07 PW1.9 92.18,58.78 96.9,63.5 96.9,73.5 ; 92.13,71.07 92.13,72.33 93.3,73.5 ; 93.3,73.5 93.75,73.95 93.75,75.95 ; 93.3,73.5 96.2,73.5 ; 93.75,75.95 CN9.1@93.75,82.6 ; 93.75,75.95 96.2,73.5 ; CN9.1@93.75,82.6 CN9.1@93.75,86.1 ; CN9.1@93.75,82.6 96.25,82.6 111.75,82.6 CN12.1@114.25,82.6 ; CN9.1@93.75,86.1 96.25,86.1 111.75,86.1 CN12.1@114.25,86.1 ; 96.2,73.5 96.9,73.5 ; 96.9,73.5 102,73.5 102.8,74.3 107.2,78.7 114.2,78.7 ; 114.2,78.7 114.25,78.75 CN12.1@114.25,82.6 ; 114.2,78.7 129.3,78.7 129.75,79.15 CN14.1@129.75,82.6 ; CN12.1@114.25,82.6 CN12.1@114.25,86.1 ; CN12.1@114.25,82.6 CN14.1@129.75,82.6 ; CN12.1@114.25,86.1 CN14.1@129.75,86.1 ; CN14.1@129.75,82.6 CN14.1@129.75,86.1
  MidLayer1 w1: RLY1.A 17.6,36.36 17.6,57.6 14.1,61.1 14.1,75.3 14.52,75.72 RLY2.1
  Bottom Layer w1: D1.K 6.975,33.325 RLY1.A
  Bottom Layer w2: CN1.1@21.75,82.6 CN1.1@24.25,82.6 ; CN1.1@21.75,86.1 CN1.1@24.25,86.1 ; PW1.8 PW1.9 ; CN1.1@24.25,82.6 24.25,78.55 25.13,77.67 42.3,77.67 ; CN1.1@24.25,82.6 CN1.1@24.25,86.1 ; CN1.1@24.25,82.6 39.75,82.6 CN3.1@42.25,82.6 ; CN1.1@24.25,86.1 39.75,86.1 CN3.1@42.25,86.1 ; CN3.1@42.25,82.6 42.25,77.72 42.3,77.67 ; CN3.1@42.25,82.6 CN3.1@42.25,86.1 ; CN3.1@42.25,82.6 57.75,82.6 CN5.1@60.25,82.6 ; CN3.1@42.25,86.1 57.75,86.1 CN5.1@60.25,86.1 ; 42.3,77.67 60.3,77.67 ; CN5.1@60.25,82.6 60.25,77.72 60.3,77.67 ; CN5.1@60.25,82.6 CN5.1@60.25,86.1 ; CN5.1@60.25,82.6 75.75,82.6 CN7.1@78.25,82.6 ; CN5.1@60.25,86.1 75.75,86.1 CN7.1@78.25,86.1 ; 60.3,77.67 73.7,77.67 ; 73.7,77.67 75.8,75.57 ; 73.7,77.67 75.8,77.67 ; 75.8,75.57 75.8,62.1 79.12,58.78 PW1.9 ; 75.8,75.57 75.8,77.67 ; 75.8,75.57 76.1,75.57 78.2,77.67 ; 75.8,77.67 78.2,77.67 ; 78.2,77.67 78.25,77.72 CN7.1@78.25,82.6 ; 78.2,77.67 90.1,77.67 ; CN7.1@78.25,82.6 CN7.1@78.25,86.1 ; CN7.1@78.25,82.6 93.75,82.6 CN9.1@96.25,82.6 ; CN7.1@78.25,86.1 93.75,86.1 CN9.1@96.25,86.1 ; 90.1,77.67 92.13,75.64 ; 90.1,77.67 92.13,77.67 ; PW1.9 96.2,62.85 96.2,75.5 ; PW1.9 92.13,75.5 ; 92.13,75.5 94.4,77.77 94.4,77.8 ; 92.13,75.5 92.13,75.64 ; 92.13,75.64 92.13,77.67 ; 92.13,77.67 92,77.8 94.4,77.8 ; 94.4,77.8 96.2,76 ; 94.4,77.8 96.2,77.8 ; 96.2,75.5 98.5,77.8 ; 96.2,75.5 96.2,76 ; 96.2,76 96.2,77.8 ; 96.2,77.8 96.25,77.85 CN9.1@96.25,82.6 ; 96.2,77.8 98.5,77.8 ; CN9.1@96.25,82.6 CN9.1@96.25,86.1 ; CN9.1@96.25,82.6 CN12.1@111.75,82.6 ; CN9.1@96.25,86.1 CN12.1@111.75,86.1 ; 98.5,77.8 111.6,77.8 ; 111.6,77.8 111.75,77.95 CN12.1@111.75,82.6 ; 111.6,77.8 131.4,77.8 132.25,78.65 CN14.1@132.25,82.6 ; CN12.1@111.75,82.6 CN12.1@111.75,86.1 ; CN12.1@111.75,82.6 114.25,82.6 129.75,82.6 CN14.1@132.25,82.6 ; CN12.1@111.75,86.1 114.25,86.1 129.75,86.1 132.25,86.1 CN14.1@132.25,82.6
PGND: CN17.1 CN18.1 CN19.1 CN21.1 CN22.1 CN23.1 CN24.1 IC1.K PW1.5 PW1.6 R2.1 | length 1285.8
  Top Layer w0.254: PW1.6 100.18,33.38 101.2,34.4 R2.1 ; IC1.K 103.7,59.8 104.4,59.1 115.19,59.1
  Top Layer w2: PW1.6 PW1.5 ; CN21.1@115.19,71.81 115.19,69.27 115.19,66.73 115.19,64.19 115.19,59.1 115.19,55.31 115.19,52.77 115.19,50.23 115.19,47.69 115.19,38.81 115.19,36.27 115.19,33.73 115.19,31.19 CN18.1@115.19,20.81 ; CN21.1@117.73,71.81 117.73,69.27 117.73,66.73 117.73,64.19 117.73,55.31 117.73,52.77 117.73,50.23 117.73,47.69 117.73,38.81 117.73,36.27 117.73,33.73 117.73,31.19 CN18.1@117.73,20.81 ; CN21.1@120.27,71.81 120.27,69.27 120.27,66.73 120.27,64.19 120.27,55.31 120.27,52.77 120.27,50.23 120.27,47.69 120.27,38.81 120.27,36.27 120.27,33.73 120.27,31.19 CN18.1@120.27,20.81 ; CN21.1@122.81,71.81 122.81,69.27 122.81,66.73 122.81,64.19 122.81,55.31 122.81,52.77 122.81,50.23 122.81,47.69 122.81,38.81 122.81,36.27 122.81,33.73 122.81,31.19 CN18.1@122.81,20.81 ; CN22.1@136.19,55.31 136.19,52.77 136.19,50.23 136.19,47.69 136.19,38.81 136.19,36.27 136.19,33.73 136.19,31.19 CN17.1@136.19,20.81 ; CN22.1@138.73,55.31 138.73,52.77 138.73,50.23 138.73,47.69 138.73,38.81 138.73,36.27 138.73,33.73 138.73,31.19 CN17.1@138.73,20.81 ; CN22.1@141.27,55.31 141.27,52.77 141.27,50.23 141.27,47.69 141.27,38.81 141.27,36.27 141.27,33.73 141.27,31.19 CN17.1@141.27,20.81 ; CN22.1@143.81,55.31 143.81,52.77 143.81,50.23 143.81,47.69 143.81,38.81 143.81,36.27 143.81,33.73 143.81,31.19 CN17.1@143.81,20.81 ; PW1.5 92.13,14.47 93.41,13.19 CN18.1@115.19,13.19 ; PW1.5 99.62,15.73 CN18.1@115.19,15.73 ; PW1.5 97.78,23.22 ; 97.78,23.22 102.73,18.27 CN18.1@115.19,18.27 ; 97.78,23.22 103.28,23.22 105.69,20.81 CN18.1@115.19,20.81 ; CN18.1@115.19,13.19 CN18.1@117.73,13.19 ; CN18.1@115.19,13.19 CN18.1@115.19,15.73 ; CN18.1@115.19,15.73 CN18.1@115.19,18.27 ; CN18.1@115.19,15.73 CN18.1@117.73,15.73 ; CN18.1@115.19,18.27 CN18.1@115.19,20.81 ; CN18.1@115.19,18.27 CN18.1@117.73,18.27 ; CN18.1@115.19,20.81 CN18.1@117.73,20.81 ; CN18.1@117.73,13.19 CN18.1@120.27,13.19 ; CN18.1@117.73,13.19 CN18.1@117.73,15.73 ; CN18.1@117.73,15.73 CN18.1@117.73,18.27 ; CN18.1@117.73,15.73 CN18.1@120.27,15.73 ; CN18.1@117.73,18.27 CN18.1@117.73,20.81 ; CN18.1@117.73,18.27 CN18.1@120.27,18.27 ; CN18.1@117.73,20.81 CN18.1@120.27,20.81 ; CN18.1@120.27,13.19 CN18.1@122.81,13.19 ; CN18.1@120.27,13.19 CN18.1@120.27,15.73 ; CN18.1@120.27,15.73 CN18.1@120.27,18.27 ; CN18.1@120.27,15.73 CN18.1@122.81,15.73 ; CN18.1@120.27,18.27 CN18.1@120.27,20.81 ; CN18.1@120.27,18.27 CN18.1@122.81,18.27 ; CN18.1@120.27,20.81 CN18.1@122.81,20.81 ; CN18.1@122.81,13.19 CN17.1@136.19,13.19 ; CN18.1@122.81,13.19 CN18.1@122.81,15.73 ; CN18.1@122.81,15.73 CN18.1@122.81,18.27 ; CN18.1@122.81,15.73 CN17.1@136.19,15.73 ; CN18.1@122.81,18.27 CN18.1@122.81,20.81 ; CN18.1@122.81,18.27 CN17.1@136.19,18.27 ; CN18.1@122.81,20.81 CN17.1@136.19,20.81 ; CN17.1@136.19,13.19 CN17.1@138.73,13.19 ; CN17.1@136.19,13.19 CN17.1@136.19,15.73 ; CN17.1@136.19,15.73 CN17.1@136.19,18.27 ; CN17.1@136.19,15.73 CN17.1@138.73,15.73 ; CN17.1@136.19,18.27 CN17.1@136.19,20.81 ; CN17.1@136.19,18.27 CN17.1@138.73,18.27 ; CN17.1@136.19,20.81 CN17.1@138.73,20.81 ; CN17.1@138.73,13.19 CN17.1@141.27,13.19 ; CN17.1@138.73,13.19 CN17.1@138.73,15.73 ; CN17.1@138.73,15.73 CN17.1@138.73,18.27 ; CN17.1@138.73,15.73 CN17.1@141.27,15.73 ; CN17.1@138.73,18.27 CN17.1@138.73,20.81 ; CN17.1@138.73,18.27 CN17.1@141.27,18.27 ; CN17.1@138.73,20.81 CN17.1@141.27,20.81 ; CN17.1@141.27,13.19 143.81,13.19 CN17.1@143.81,15.73 ; CN17.1@141.27,13.19 CN17.1@141.27,15.73 ; CN17.1@141.27,15.73 CN17.1@141.27,18.27 ; CN17.1@141.27,15.73 CN17.1@143.81,15.73 ; CN17.1@141.27,18.27 CN17.1@141.27,20.81 ; CN17.1@141.27,18.27 CN17.1@143.81,18.27 ; CN17.1@141.27,20.81 CN17.1@143.81,20.81 ; CN17.1@143.81,15.73 CN17.1@143.81,18.27 ; CN17.1@143.81,18.27 CN17.1@143.81,20.81
  Bottom Layer w2: PW1.6 PW1.5 ; CN21.1@115.19,71.81 115.19,69.27 115.19,66.73 115.19,64.19 115.19,55.31 115.19,52.77 115.19,50.23 115.19,47.69 115.19,38.81 115.19,36.27 115.19,33.73 115.19,31.19 CN18.1@115.19,20.81 ; CN21.1@117.73,71.81 117.73,69.27 117.73,66.73 117.73,64.19 117.73,55.31 117.73,52.77 117.73,50.23 117.73,47.69 117.73,38.81 117.73,36.27 117.73,33.73 117.73,31.19 CN18.1@117.73,20.81 ; CN21.1@120.27,71.81 120.27,69.27 120.27,66.73 120.27,64.19 120.27,55.31 120.27,52.77 120.27,50.23 120.27,47.69 120.27,38.81 120.27,36.27 120.27,33.73 120.27,31.19 CN18.1@120.27,20.81 ; CN21.1@122.81,71.81 122.81,69.27 122.81,66.73 122.81,64.19 122.81,55.31 122.81,52.77 122.81,50.23 122.81,47.69 122.81,38.81 122.81,36.27 122.81,33.73 122.81,31.19 CN18.1@122.81,20.81 ; CN22.1@136.19,55.31 136.19,52.77 136.19,50.23 136.19,47.69 136.19,38.81 136.19,36.27 136.19,33.73 136.19,31.19 CN17.1@136.19,20.81 ; CN22.1@138.73,55.31 138.73,52.77 138.73,50.23 138.73,47.69 138.73,38.81 138.73,36.27 138.73,33.73 138.73,31.19 CN17.1@138.73,20.81 ; CN22.1@141.27,55.31 141.27,52.77 141.27,50.23 141.27,47.69 141.27,38.81 141.27,36.27 141.27,33.73 141.27,31.19 CN17.1@141.27,20.81 ; CN22.1@143.81,55.31 143.81,52.77 143.81,50.23 143.81,47.69 143.81,38.81 143.81,36.27 143.81,33.73 143.81,31.19 CN17.1@143.81,20.81 ; PW1.5 97.78,23.22 ; PW1.5 99.62,15.73 CN18.1@115.19,15.73 ; PW1.5 92.13,14.47 93.41,13.19 CN18.1@115.19,13.19 ; 97.78,23.22 103.28,23.22 105.69,20.81 CN18.1@115.19,20.81 ; 97.78,23.22 102.73,18.27 CN18.1@115.19,18.27 ; CN18.1@115.19,13.19 CN18.1@115.19,15.73 ; CN18.1@115.19,13.19 CN18.1@117.73,13.19 ; CN18.1@115.19,15.73 CN18.1@117.73,15.73 ; CN18.1@115.19,15.73 CN18.1@115.19,18.27 ; CN18.1@115.19,18.27 CN18.1@117.73,18.27 ; CN18.1@115.19,18.27 CN18.1@115.19,20.81 ; CN18.1@115.19,20.81 CN18.1@117.73,20.81 ; CN18.1@117.73,13.19 CN18.1@117.73,15.73 ; CN18.1@117.73,13.19 CN18.1@120.27,13.19 ; CN18.1@117.73,15.73 CN18.1@120.27,15.73 ; CN18.1@117.73,15.73 CN18.1@117.73,18.27 ; CN18.1@117.73,18.27 CN18.1@120.27,18.27 ; CN18.1@117.73,18.27 CN18.1@117.73,20.81 ; CN18.1@117.73,20.81 CN18.1@120.27,20.81 ; CN18.1@120.27,13.19 CN18.1@120.27,15.73 ; CN18.1@120.27,13.19 CN18.1@122.81,13.19 ; CN18.1@120.27,15.73 CN18.1@122.81,15.73 ; CN18.1@120.27,15.73 CN18.1@120.27,18.27 ; CN18.1@120.27,18.27 CN18.1@122.81,18.27 ; CN18.1@120.27,18.27 CN18.1@120.27,20.81 ; CN18.1@120.27,20.81 CN18.1@122.81,20.81 ; CN18.1@122.81,13.19 CN18.1@122.81,15.73 ; CN18.1@122.81,13.19 CN17.1@136.19,13.19 ; CN18.1@122.81,15.73 CN17.1@136.19,15.73 ; CN18.1@122.81,15.73 CN18.1@122.81,18.27 ; CN18.1@122.81,18.27 CN17.1@136.19,18.27 ; CN18.1@122.81,18.27 CN18.1@122.81,20.81 ; CN18.1@122.81,20.81 CN17.1@136.19,20.81 ; CN17.1@136.19,13.19 CN17.1@136.19,15.73 ; CN17.1@136.19,13.19 CN17.1@138.73,13.19 ; CN17.1@136.19,15.73 CN17.1@138.73,15.73 ; CN17.1@136.19,15.73 CN17.1@136.19,18.27 ; CN17.1@136.19,18.27 CN17.1@138.73,18.27 ; CN17.1@136.19,18.27 CN17.1@136.19,20.81 ; CN17.1@136.19,20.81 CN17.1@138.73,20.81 ; CN17.1@138.73,13.19 CN17.1@138.73,15.73 ; CN17.1@138.73,13.19 CN17.1@141.27,13.19 ; CN17.1@138.73,15.73 CN17.1@141.27,15.73 ; CN17.1@138.73,15.73 CN17.1@138.73,18.27 ; CN17.1@138.73,18.27 CN17.1@141.27,18.27 ; CN17.1@138.73,18.27 CN17.1@138.73,20.81 ; CN17.1@138.73,20.81 CN17.1@141.27,20.81 ; CN17.1@141.27,13.19 CN17.1@141.27,15.73 ; CN17.1@141.27,13.19 143.81,13.19 CN17.1@143.81,15.73 ; CN17.1@141.27,15.73 CN17.1@143.81,15.73 ; CN17.1@141.27,15.73 CN17.1@141.27,18.27 ; CN17.1@141.27,18.27 CN17.1@143.81,18.27 ; CN17.1@141.27,18.27 CN17.1@141.27,20.81 ; CN17.1@141.27,20.81 CN17.1@143.81,20.81 ; CN17.1@143.81,15.73 CN17.1@143.81,18.27 ; CN17.1@143.81,18.27 CN17.1@143.81,20.81
pads on no net: CN1.B CN3.B CN5.B CN7.B CN9.B CN12.B CN14.B CN25.2 CN25.6 CN25.7 D2.2 FID8_1.1 FID8_1_1.1 FID10_1.1 FID10_1_1.1 IC5.3 PW1.3 PW1.B RLY2.2 RLY2.5 RLY2.6 RLY2.7 RLY2.8 RLY2.9 SN1.0 SN2.0 SN3.0 SN4.0 TOOLHOLE1_1.TOOL TOOLHOLE1_1_1.TOOL TOOLHOLE5_1.TOOL1 TOOLHOLE5_1_1.TOOL1

## Polygon pours and split planes (outlines as drawn)
PGND on Top Layer "Bottom Layer-No Net" (solid, remove dead copper, pour order 2): 135.31,56.19 135.32,56.2 144.69,56.2 144.69,12.31 144.7,12.3 144.66,12.26 89.64,12.26 89.64,35.74 89.61,35.77 95.61,35.77 95.65,35.81 95.65,25.78 95.66,25.77 114.24,25.77 114.25,25.78 114.25,72.55 114.34,72.64 123.66,72.64 123.7,72.68 123.7,21.75 123.71,21.74 135.22,21.74 135.28,21.8 135.28,56.14 135.31,56.17
PGND on Bottom Layer "Bottom Layer-No Net" (solid, remove dead copper, pour order 2): 135.31,56.19 135.32,56.2 144.69,56.2 144.69,12.31 144.7,12.3 144.66,12.26 89.64,12.26 89.64,35.74 89.61,35.77 95.61,35.77 95.65,35.81 95.65,25.78 95.66,25.77 114.24,25.77 114.25,25.78 114.25,72.55 114.34,72.64 123.66,72.64 123.7,72.68 123.7,21.75 123.71,21.74 135.22,21.74 135.28,21.8 135.28,56.14 135.31,56.17

## Keep-outs
Keep-Out Layer:
  lines w0.5: -3,5 157,5 157,115 -3,115 -3,5

## Other copper
Top Layer:
  text "rLoop - DC / DC Converter, Rev 1.0" at 4.4,-1.3 h3

## Silkscreen, mask and mechanical layers (free items; w line width, h text height)
Top Overlay:
  text "WDT LOCK" at 9.1,107.4 h2
  text "POWER A +24" at 36.8,100.5 h2 r90
  text "POWER B +24" at 54.8,100.5 h2 r90
  text "COMMAND +24" at 72.8,100.5 h2 r90
  text "CONTROL +24" at 90.8,100.5 h2 r90
  text "GIMBAL +24" at 108.8,100.5 h2 r90
  text "BRAKE +24" at 126.8,100.5 h2 r90
  text "NETWKS +24" at 144.8,100.5 h2 r90
  text "IGNITER +" at -1.6,97.2 h1 r90
  text "3V3" at -1.4,92 h1 r90
  text "WDT" at -1.4,89.3 h1 r90
  text "DGND" at -1.4,86.2 h1 r90
  text "IGNITER -" at -1.5,76.8 h1 r90
  text "0V" at 124.5,63.2 h2
  text "+24V AVAIL" at 111.6,60.2 h2 r90
  text "BATT HV ON" at 56.9,54.9 h2
  text "BATT POS" at 8.3,54 h2
  text "0V" at 124.5,46.7 h2
  text "0V" at 145.5,46.7 h2
  text "0V" at 124.5,30.2 h2
  text "0V" at 145.5,30.2 h2
  text "rLoop DC / DC Converter" at 48.9,29.1 h2
  text "Rev 1.0" at 48.8,26.7 h2
  text "S/N:" at 48.7,21.9 h2
  text "BATT NEG" at 7.6,18.4 h2
  text "DISABLE" at 30.2,18.4 h2 r90
  text "0V" at 124.5,12.2 h2
  text "0V" at 145.5,12.2 h2
Mechanical 1:
  lines w0.1: -11,-4 -11,125 165,125 165,-4 -11,-4
  lines w0.127: -3,5 -3,115 157,115 157,5 -3,5
Mechanical 3:
  lines w1.2: 20.1,41.1 38.6,41.1
  lines w2.4: -4.2,36.2 -4.2,3.8 75.8,3.8 ; -4.2,42.2 -4.2,116.2 74.6,116.2 ; 80.5,116.2 158.2,116.2 158.2,79.8 ; 81.6,3.8 158.2,3.8 158.2,73.8

## Text inside footprints (layer, text, board x,y; h text height)
LBL1: Top Overlay "DANGER" at 58.863,39.794 h2.16; Top Overlay "HIGH VOLTAGE" at 55.942,38.016 h2.16
LBL2: Top Overlay "rloop.org" at 72.75,22.6 h1